# EAGLE board SparkFun_u-blox_SAM-M10Q-Panel (EAGLE 9.6.2), part 1 of 3
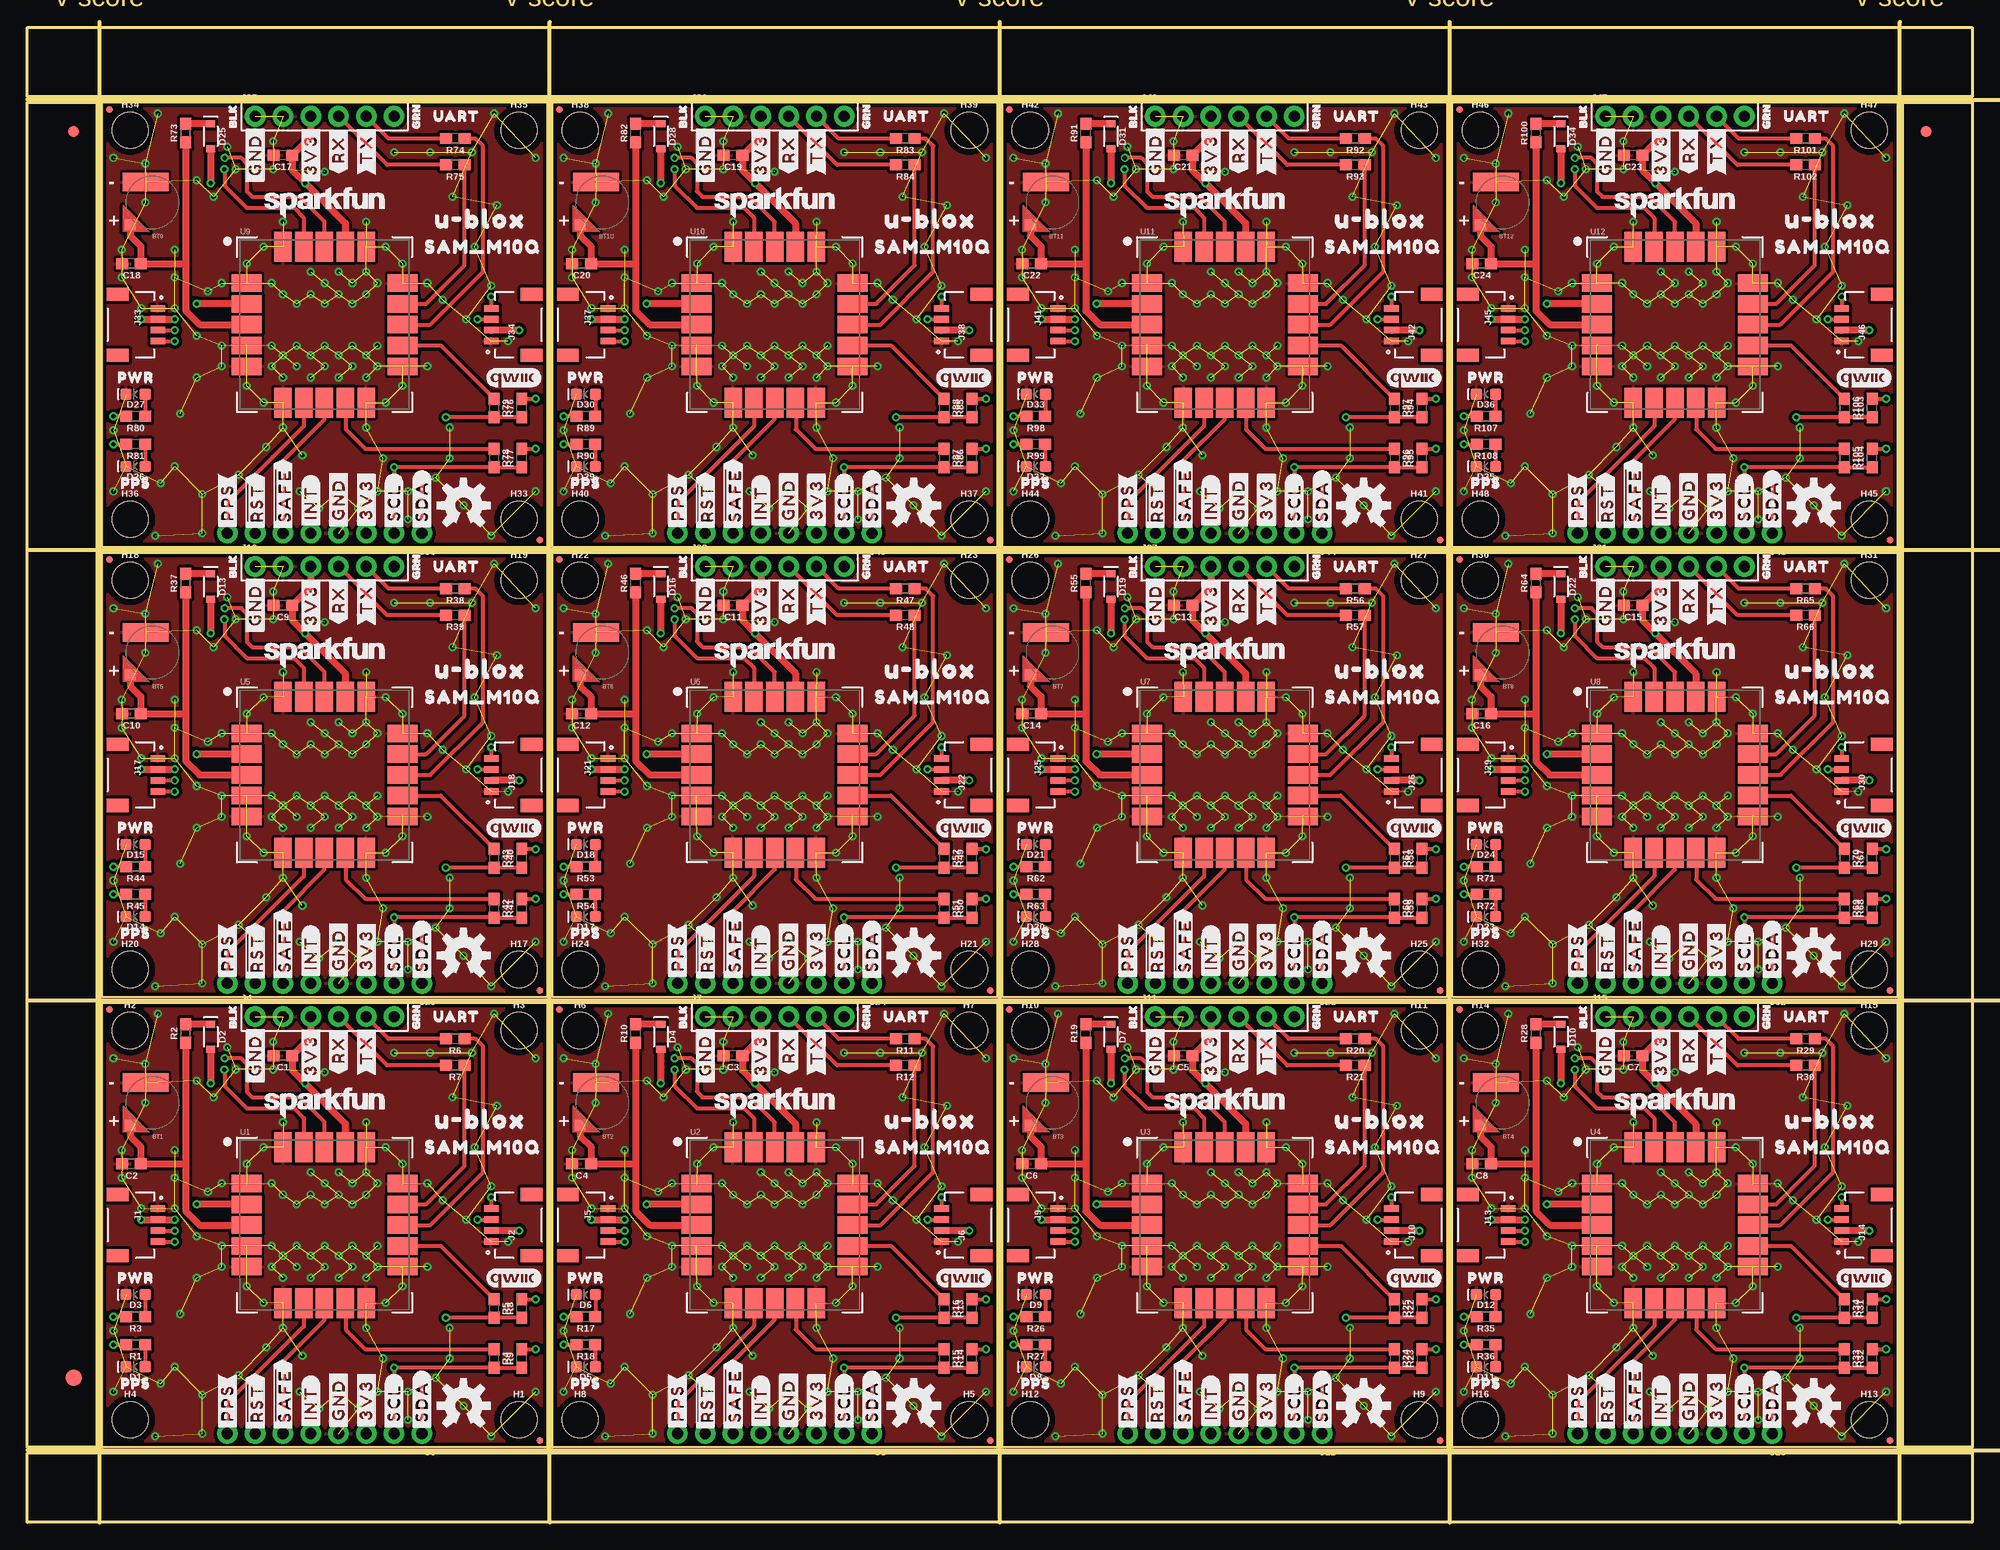
[diagram p0: board, top side]
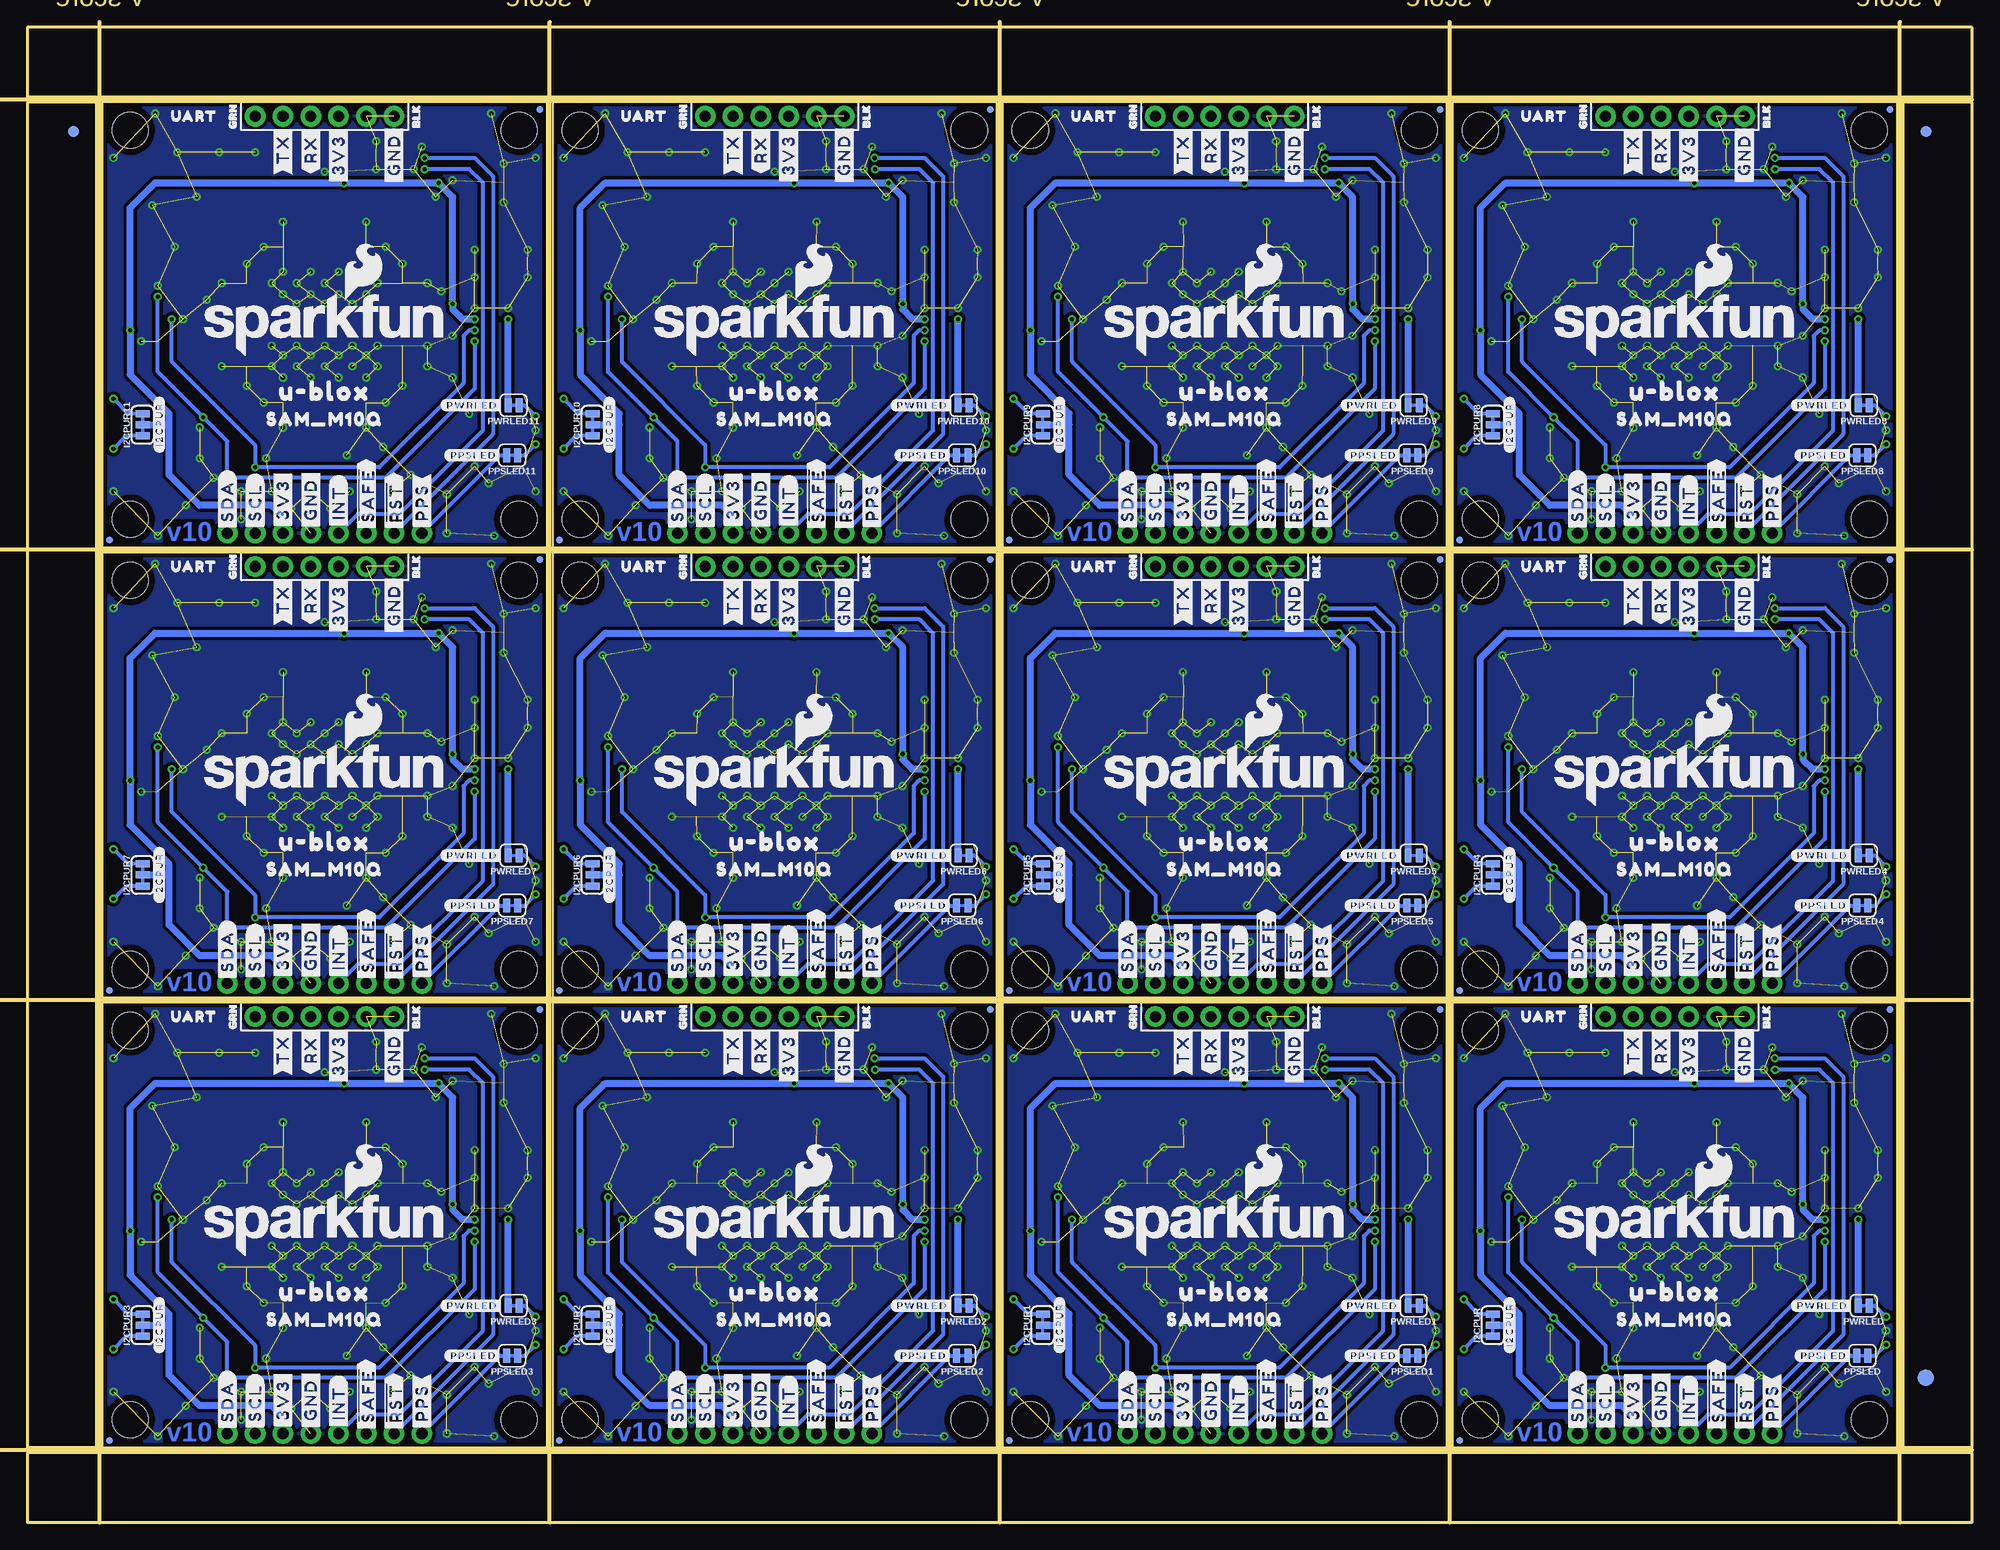
[diagram p1: board, bottom side, seen from below]

Size 177.8 x 136.65 mm. Coordinates in mm from the lower left corner, seen from the top.
Outline: 6.86,6.86 6.86,47.5 47.5,47.5 47.5,6.86 6.86,6.86
Outline: 48.01,6.86 48.01,47.5 88.65,47.5 88.65,6.86 48.01,6.86
Outline: 89.15,6.86 89.15,47.5 129.79,47.5 129.79,6.86 89.15,6.86
Outline: 130.3,6.86 130.3,47.5 170.94,47.5 170.94,6.86 130.3,6.86
Outline: 6.86,48.01 6.86,88.65 47.5,88.65 47.5,48.01 6.86,48.01
Outline: 48.01,48.01 48.01,88.65 88.65,88.65 88.65,48.01 48.01,48.01
Outline: 89.15,48.01 89.15,88.65 129.79,88.65 129.79,48.01 89.15,48.01
Outline: 130.3,48.01 130.3,88.65 170.94,88.65 170.94,48.01 130.3,48.01
Outline: 6.86,89.15 6.86,129.79 47.5,129.79 47.5,89.15 6.86,89.15
Outline: 48.01,89.15 48.01,129.79 88.65,129.79 88.65,89.15 48.01,89.15
Outline: 89.15,89.15 89.15,129.79 129.79,129.79 129.79,89.15 89.15,89.15
Outline: 130.3,89.15 130.3,129.79 170.94,129.79 170.94,89.15 130.3,89.15
Outline: 0,6.35 177.8,6.35 177.8,0 0,0 0,6.35
Outline: 171.45,129.79 177.8,129.79 177.8,6.86 171.45,6.86 171.45,129.79
Outline: 0,136.65 177.8,136.65 177.8,130.3 0,130.3 0,136.65
Outline: 0,129.79 6.35,129.79 6.35,6.86 0,6.86 0,129.79
Copper layers (1*16): Top 0.035mm / dielectric 1.5mm / Bottom 0.035mm
Design rules "SparkFun_u-blox_SAM-M10Q": minimum track width 7mil, minimum drill 0.3mm, track to track 7mil, track to pad 7mil, pad to pad 7mil, via to via 7mil, smd to smd 7mil, copper to edge 7mil, drill to drill 7mil, minimum pad ring 7mil, minimum via ring 7mil, stop-mask expansion 3mil, vias tented up to drill 25mil, thermal gap 10mil
tRestrict: area 19.8,24.3 to 20.3,24.4; area 61,24.3 to 61.5,24.4; area 102.1,24.3 to 102.6,24.4; area 143.3,24.3 to 143.8,24.4; area 19.8,65.4 to 20.3,65.5; area 61,65.4 to 61.5,65.5; area 102.1,65.4 to 102.6,65.5; area 143.3,65.4 to 143.8,65.5; area 19.8,106.6 to 20.3,106.7; area 61,106.6 to 61.5,106.7; area 102.1,106.6 to 102.6,106.7; area 143.3,106.6 to 143.8,106.7
Milling: 9 lines

## Footprints (pad centres in the part's own frame; a part is rotated, then mirrored left to right if it is on the bottom)
ML414H_IV01E = smd 1 x 1: + 2.022,2.032 | smd 4.2 x 1.7: - 0.6,-1.85
0603 = smd 1.1 x 1: 1 -0.85,0; 2 0.85,0
LED-0603 = smd 1 x 1: A -0.877,0; C 0.877,0
SOD-323 = smd 0.63 x 0.83: A 1.15,0; C -1.15,0
FIDUCIAL-1X2 = smd 1 x 1: 1 0,0
FIDUCIAL-1.5X3 = smd 1.5 x 1.5: 1 0,0
FIDUCIAL-MICRO = smd 0.635 x 0.635: 1 0,0
STAND-OFF = hole 3.302: 0,0
SMT-JUMPER_3_2-NC_TRACE_SILK = smd 0.635 x 1.27: 1 -1.016,0; 2 0,0; 3 1.016,0
JST04_1MM_RA = smd 0.6 x 1.35: 1 -1.5,0; 2 -0.5,0; 3 0.5,0; 4 1.5,0 | smd 1.2 x 2: NC1 2.8,-3.675; NC2 -2.8,-3.675
1X08_NO_SILK = drill 1.016 pad 1.88: 1 0,0; 2 2.54,0; 3 5.08,0; 4 7.62,0; 5 10.16,0; 6 12.7,0; 7 15.24,0; 8 17.78,0
1X06_NO_SILK = drill 1.016 pad 1.88: 1 0,0; 2 2.54,0; 3 5.08,0; 4 7.62,0; 5 10.16,0; 6 12.7,0
SMT-JUMPER_2_NC_TRACE_SILK = smd 0.635 x 1.27: 1 -0.508,0; 2 0.508,0
SAM-M10Q = smd 2.75 x 1.6: 1 -7.125,3.8; 2 -7.125,1.9; 3 -7.125,0; 4 -7.125,-1.9; 5 -7.125,-3.8; 11 7.125,-3.8; 12 7.125,-1.9; 13 7.125,0; 14 7.125,1.9; 15 7.125,3.8 | smd 1.6 x 2.75: 6 -3.8,-7.125; 7 -1.9,-7.125; 8 0,-7.125; 9 1.9,-7.125; 10 3.8,-7.125; 16 3.8,7.125; 17 1.9,7.125; 18 0,7.125; 19 -1.9,7.125; 20 -3.8,7.125

## Placement (x,y rotation side)
BT1  6.8MM_COIN_CELL  [ML414H_IV01E]  11.43,38.35 180 top
BT2  6.8MM_COIN_CELL  [ML414H_IV01E]  52.58,38.35 180 top
BT3  6.8MM_COIN_CELL  [ML414H_IV01E]  93.73,38.35 180 top
BT4  6.8MM_COIN_CELL  [ML414H_IV01E]  134.87,38.35 180 top
BT5  6.8MM_COIN_CELL  [ML414H_IV01E]  11.43,79.5 180 top
BT6  6.8MM_COIN_CELL  [ML414H_IV01E]  52.58,79.5 180 top
BT7  6.8MM_COIN_CELL  [ML414H_IV01E]  93.73,79.5 180 top
BT8  6.8MM_COIN_CELL  [ML414H_IV01E]  134.87,79.5 180 top
BT9  6.8MM_COIN_CELL  [ML414H_IV01E]  11.43,120.65 180 top
BT10  6.8MM_COIN_CELL  [ML414H_IV01E]  52.58,120.65 180 top
BT11  6.8MM_COIN_CELL  [ML414H_IV01E]  93.73,120.65 180 top
BT12  6.8MM_COIN_CELL  [ML414H_IV01E]  134.87,120.65 180 top
C1  0.1uF  [0603]  23.37,42.67 180 top
C2  0.1uF  [0603]  9.52,32.77 180 top
C3  0.1uF  [0603]  64.52,42.67 180 top
C4  0.1uF  [0603]  50.67,32.77 180 top
C5  0.1uF  [0603]  105.66,42.67 180 top
C6  0.1uF  [0603]  91.82,32.77 180 top
C7  0.1uF  [0603]  146.81,42.67 180 top
C8  0.1uF  [0603]  132.97,32.77 180 top
C9  0.1uF  [0603]  23.37,83.82 180 top
C10  0.1uF  [0603]  9.52,73.91 180 top
C11  0.1uF  [0603]  64.52,83.82 180 top
C12  0.1uF  [0603]  50.67,73.91 180 top
C13  0.1uF  [0603]  105.66,83.82 180 top
C14  0.1uF  [0603]  91.82,73.91 180 top
C15  0.1uF  [0603]  146.81,83.82 180 top
C16  0.1uF  [0603]  132.97,73.91 180 top
C17  0.1uF  [0603]  23.37,124.97 180 top
C18  0.1uF  [0603]  9.52,115.06 180 top
C19  0.1uF  [0603]  64.52,124.97 180 top
C20  0.1uF  [0603]  50.67,115.06 180 top
C21  0.1uF  [0603]  105.66,124.97 180 top
C22  0.1uF  [0603]  91.82,115.06 180 top
C23  0.1uF  [0603]  146.81,124.97 180 top
C24  0.1uF  [0603]  132.97,115.06 180 top
D1  Yellow  [LED-0603]  9.91,14.22 180 top
D2  0.5A/40V/420mV  [SOD-323]  16.76,44.4 270 top
D3  RED  [LED-0603]  9.91,20.83 180 top
D4  0.5A/40V/420mV  [SOD-323]  57.91,44.4 270 top
D5  Yellow  [LED-0603]  51.05,14.22 180 top
D6  RED  [LED-0603]  51.05,20.83 180 top
D7  0.5A/40V/420mV  [SOD-323]  99.06,44.4 270 top
D8  Yellow  [LED-0603]  92.2,14.22 180 top
D9  RED  [LED-0603]  92.2,20.83 180 top
D10  0.5A/40V/420mV  [SOD-323]  140.21,44.4 270 top
D11  Yellow  [LED-0603]  133.35,14.22 180 top
D12  RED  [LED-0603]  133.35,20.83 180 top
D13  0.5A/40V/420mV  [SOD-323]  16.76,85.55 270 top
D14  Yellow  [LED-0603]  9.91,55.37 180 top
D15  RED  [LED-0603]  9.91,61.98 180 top
D16  0.5A/40V/420mV  [SOD-323]  57.91,85.55 270 top
D17  Yellow  [LED-0603]  51.05,55.37 180 top
D18  RED  [LED-0603]  51.05,61.98 180 top
D19  0.5A/40V/420mV  [SOD-323]  99.06,85.55 270 top
D20  Yellow  [LED-0603]  92.2,55.37 180 top
D21  RED  [LED-0603]  92.2,61.98 180 top
D22  0.5A/40V/420mV  [SOD-323]  140.21,85.55 270 top
D23  Yellow  [LED-0603]  133.35,55.37 180 top
D24  RED  [LED-0603]  133.35,61.98 180 top
D25  0.5A/40V/420mV  [SOD-323]  16.76,126.7 270 top
D26  Yellow  [LED-0603]  9.91,96.52 180 top
D27  RED  [LED-0603]  9.91,103.12 180 top
D28  0.5A/40V/420mV  [SOD-323]  57.91,126.7 270 top
D29  Yellow  [LED-0603]  51.05,96.52 180 top
D30  RED  [LED-0603]  51.05,103.12 180 top
D31  0.5A/40V/420mV  [SOD-323]  99.06,126.7 270 top
D32  Yellow  [LED-0603]  92.2,96.52 180 top
D33  RED  [LED-0603]  92.2,103.12 180 top
D34  0.5A/40V/420mV  [SOD-323]  140.21,126.7 270 top
D35  Yellow  [LED-0603]  133.35,96.52 180 top
D36  RED  [LED-0603]  133.35,103.12 180 top
E$1  [FIDUCIAL-1X2]  4.23,127.13 0 top
E$2  [FIDUCIAL-1X2]  4.23,127.13 0 bottom
E$3  [FIDUCIAL-1X2]  173.57,127.13 0 top
E$4  [FIDUCIAL-1X2]  173.57,127.13 0 bottom
E$5  [FIDUCIAL-1.5X3]  4.23,13.21 0 top
E$6  [FIDUCIAL-1.5X3]  4.23,13.21 0 bottom
FD1  FIDUCIALUFIDUCIAL  [FIDUCIAL-MICRO]  46.86,7.49 0 bottom
FD2  FIDUCIALUFIDUCIAL  [FIDUCIAL-MICRO]  7.49,46.86 0 top
FD3  FIDUCIALUFIDUCIAL  [FIDUCIAL-MICRO]  7.49,46.86 0 bottom
FD4  FIDUCIALUFIDUCIAL  [FIDUCIAL-MICRO]  46.86,7.49 0 top
FD5  FIDUCIALUFIDUCIAL  [FIDUCIAL-MICRO]  88.01,7.49 0 bottom
FD6  FIDUCIALUFIDUCIAL  [FIDUCIAL-MICRO]  48.64,46.86 0 top
FD7  FIDUCIALUFIDUCIAL  [FIDUCIAL-MICRO]  48.64,46.86 0 bottom
FD8  FIDUCIALUFIDUCIAL  [FIDUCIAL-MICRO]  88.01,7.49 0 top
FD9  FIDUCIALUFIDUCIAL  [FIDUCIAL-MICRO]  129.16,7.49 0 bottom
FD10  FIDUCIALUFIDUCIAL  [FIDUCIAL-MICRO]  89.79,46.86 0 top
FD11  FIDUCIALUFIDUCIAL  [FIDUCIAL-MICRO]  89.79,46.86 0 bottom
FD12  FIDUCIALUFIDUCIAL  [FIDUCIAL-MICRO]  129.16,7.49 0 top
FD13  FIDUCIALUFIDUCIAL  [FIDUCIAL-MICRO]  170.31,7.49 0 bottom
FD14  FIDUCIALUFIDUCIAL  [FIDUCIAL-MICRO]  130.94,46.86 0 top
FD15  FIDUCIALUFIDUCIAL  [FIDUCIAL-MICRO]  130.94,46.86 0 bottom
FD16  FIDUCIALUFIDUCIAL  [FIDUCIAL-MICRO]  170.31,7.49 0 top
FD17  FIDUCIALUFIDUCIAL  [FIDUCIAL-MICRO]  46.86,48.64 0 bottom
FD18  FIDUCIALUFIDUCIAL  [FIDUCIAL-MICRO]  7.49,88.01 0 top
FD19  FIDUCIALUFIDUCIAL  [FIDUCIAL-MICRO]  7.49,88.01 0 bottom
FD20  FIDUCIALUFIDUCIAL  [FIDUCIAL-MICRO]  46.86,48.64 0 top
FD21  FIDUCIALUFIDUCIAL  [FIDUCIAL-MICRO]  88.01,48.64 0 bottom
FD22  FIDUCIALUFIDUCIAL  [FIDUCIAL-MICRO]  48.64,88.01 0 top
FD23  FIDUCIALUFIDUCIAL  [FIDUCIAL-MICRO]  48.64,88.01 0 bottom
FD24  FIDUCIALUFIDUCIAL  [FIDUCIAL-MICRO]  88.01,48.64 0 top
FD25  FIDUCIALUFIDUCIAL  [FIDUCIAL-MICRO]  129.16,48.64 0 bottom
FD26  FIDUCIALUFIDUCIAL  [FIDUCIAL-MICRO]  89.79,88.01 0 top
FD27  FIDUCIALUFIDUCIAL  [FIDUCIAL-MICRO]  89.79,88.01 0 bottom
FD28  FIDUCIALUFIDUCIAL  [FIDUCIAL-MICRO]  129.16,48.64 0 top
FD29  FIDUCIALUFIDUCIAL  [FIDUCIAL-MICRO]  170.31,48.64 0 bottom
FD30  FIDUCIALUFIDUCIAL  [FIDUCIAL-MICRO]  130.94,88.01 0 top
FD31  FIDUCIALUFIDUCIAL  [FIDUCIAL-MICRO]  130.94,88.01 0 bottom
FD32  FIDUCIALUFIDUCIAL  [FIDUCIAL-MICRO]  170.31,48.64 0 top
FD33  FIDUCIALUFIDUCIAL  [FIDUCIAL-MICRO]  46.86,89.79 0 bottom
FD34  FIDUCIALUFIDUCIAL  [FIDUCIAL-MICRO]  7.49,129.16 0 top
FD35  FIDUCIALUFIDUCIAL  [FIDUCIAL-MICRO]  7.49,129.16 0 bottom
FD36  FIDUCIALUFIDUCIAL  [FIDUCIAL-MICRO]  46.86,89.79 0 top
FD37  FIDUCIALUFIDUCIAL  [FIDUCIAL-MICRO]  88.01,89.79 0 bottom
FD38  FIDUCIALUFIDUCIAL  [FIDUCIAL-MICRO]  48.64,129.16 0 top
FD39  FIDUCIALUFIDUCIAL  [FIDUCIAL-MICRO]  48.64,129.16 0 bottom
FD40  FIDUCIALUFIDUCIAL  [FIDUCIAL-MICRO]  88.01,89.79 0 top
FD41  FIDUCIALUFIDUCIAL  [FIDUCIAL-MICRO]  129.16,89.79 0 bottom
FD42  FIDUCIALUFIDUCIAL  [FIDUCIAL-MICRO]  89.79,129.16 0 top
FD43  FIDUCIALUFIDUCIAL  [FIDUCIAL-MICRO]  89.79,129.16 0 bottom
FD44  FIDUCIALUFIDUCIAL  [FIDUCIAL-MICRO]  129.16,89.79 0 top
FD45  FIDUCIALUFIDUCIAL  [FIDUCIAL-MICRO]  170.31,89.79 0 bottom
FD46  FIDUCIALUFIDUCIAL  [FIDUCIAL-MICRO]  130.94,129.16 0 top
FD47  FIDUCIALUFIDUCIAL  [FIDUCIAL-MICRO]  130.94,129.16 0 bottom
FD48  FIDUCIALUFIDUCIAL  [FIDUCIAL-MICRO]  170.31,89.79 0 top
H1  STAND-OFF  [STAND-OFF]  44.96,9.4 0 top
H2  STAND-OFF  [STAND-OFF]  9.4,44.96 0 top
H3  STAND-OFF  [STAND-OFF]  44.96,44.96 0 top
H4  STAND-OFF  [STAND-OFF]  9.4,9.4 0 top
H5  STAND-OFF  [STAND-OFF]  86.11,9.4 0 top
H6  STAND-OFF  [STAND-OFF]  50.55,44.96 0 top
H7  STAND-OFF  [STAND-OFF]  86.11,44.96 0 top
H8  STAND-OFF  [STAND-OFF]  50.55,9.4 0 top
H9  STAND-OFF  [STAND-OFF]  127.25,9.4 0 top
H10  STAND-OFF  [STAND-OFF]  91.69,44.96 0 top
H11  STAND-OFF  [STAND-OFF]  127.25,44.96 0 top
H12  STAND-OFF  [STAND-OFF]  91.69,9.4 0 top
H13  STAND-OFF  [STAND-OFF]  168.4,9.4 0 top
H14  STAND-OFF  [STAND-OFF]  132.84,44.96 0 top
H15  STAND-OFF  [STAND-OFF]  168.4,44.96 0 top
H16  STAND-OFF  [STAND-OFF]  132.84,9.4 0 top
H17  STAND-OFF  [STAND-OFF]  44.96,50.55 0 top
H18  STAND-OFF  [STAND-OFF]  9.4,86.11 0 top
H19  STAND-OFF  [STAND-OFF]  44.96,86.11 0 top
H20  STAND-OFF  [STAND-OFF]  9.4,50.55 0 top
H21  STAND-OFF  [STAND-OFF]  86.11,50.55 0 top
H22  STAND-OFF  [STAND-OFF]  50.55,86.11 0 top
H23  STAND-OFF  [STAND-OFF]  86.11,86.11 0 top
H24  STAND-OFF  [STAND-OFF]  50.55,50.55 0 top
H25  STAND-OFF  [STAND-OFF]  127.25,50.55 0 top
H26  STAND-OFF  [STAND-OFF]  91.69,86.11 0 top
H27  STAND-OFF  [STAND-OFF]  127.25,86.11 0 top
H28  STAND-OFF  [STAND-OFF]  91.69,50.55 0 top
H29  STAND-OFF  [STAND-OFF]  168.4,50.55 0 top
H30  STAND-OFF  [STAND-OFF]  132.84,86.11 0 top
H31  STAND-OFF  [STAND-OFF]  168.4,86.11 0 top
H32  STAND-OFF  [STAND-OFF]  132.84,50.55 0 top
H33  STAND-OFF  [STAND-OFF]  44.96,91.69 0 top
H34  STAND-OFF  [STAND-OFF]  9.4,127.25 0 top
H35  STAND-OFF  [STAND-OFF]  44.96,127.25 0 top
H36  STAND-OFF  [STAND-OFF]  9.4,91.69 0 top
H37  STAND-OFF  [STAND-OFF]  86.11,91.69 0 top
H38  STAND-OFF  [STAND-OFF]  50.55,127.25 0 top
H39  STAND-OFF  [STAND-OFF]  86.11,127.25 0 top
H40  STAND-OFF  [STAND-OFF]  50.55,91.69 0 top
H41  STAND-OFF  [STAND-OFF]  127.25,91.69 0 top
H42  STAND-OFF  [STAND-OFF]  91.69,127.25 0 top
H43  STAND-OFF  [STAND-OFF]  127.25,127.25 0 top
H44  STAND-OFF  [STAND-OFF]  91.69,91.69 0 top
H45  STAND-OFF  [STAND-OFF]  168.4,91.69 0 top
H46  STAND-OFF  [STAND-OFF]  132.84,127.25 0 top
H47  STAND-OFF  [STAND-OFF]  168.4,127.25 0 top
H48  STAND-OFF  [STAND-OFF]  132.84,91.69 0 top
I2CPUR  JUMPER-SMT_3_2-NC_TRACE_SILK  [SMT-JUMPER_3_2-NC_TRACE_SILK]  43.81,18.03 90 bottom
I2CPUR1  JUMPER-SMT_3_2-NC_TRACE_SILK  [SMT-JUMPER_3_2-NC_TRACE_SILK]  84.96,18.03 90 bottom
I2CPUR2  JUMPER-SMT_3_2-NC_TRACE_SILK  [SMT-JUMPER_3_2-NC_TRACE_SILK]  126.11,18.03 90 bottom
I2CPUR3  JUMPER-SMT_3_2-NC_TRACE_SILK  [SMT-JUMPER_3_2-NC_TRACE_SILK]  167.26,18.03 90 bottom
I2CPUR4  JUMPER-SMT_3_2-NC_TRACE_SILK  [SMT-JUMPER_3_2-NC_TRACE_SILK]  43.81,59.18 90 bottom
I2CPUR5  JUMPER-SMT_3_2-NC_TRACE_SILK  [SMT-JUMPER_3_2-NC_TRACE_SILK]  84.96,59.18 90 bottom
I2CPUR6  JUMPER-SMT_3_2-NC_TRACE_SILK  [SMT-JUMPER_3_2-NC_TRACE_SILK]  126.11,59.18 90 bottom
I2CPUR7  JUMPER-SMT_3_2-NC_TRACE_SILK  [SMT-JUMPER_3_2-NC_TRACE_SILK]  167.26,59.18 90 bottom
I2CPUR8  JUMPER-SMT_3_2-NC_TRACE_SILK  [SMT-JUMPER_3_2-NC_TRACE_SILK]  43.81,100.33 90 bottom
I2CPUR9  JUMPER-SMT_3_2-NC_TRACE_SILK  [SMT-JUMPER_3_2-NC_TRACE_SILK]  84.96,100.33 90 bottom
I2CPUR10  JUMPER-SMT_3_2-NC_TRACE_SILK  [SMT-JUMPER_3_2-NC_TRACE_SILK]  126.11,100.33 90 bottom
I2CPUR11  JUMPER-SMT_3_2-NC_TRACE_SILK  [SMT-JUMPER_3_2-NC_TRACE_SILK]  167.26,100.33 90 bottom
J1  Qwiic Right Angle  [JST04_1MM_RA]  11.94,27.18 270 top
J2  Qwiic Right Angle  [JST04_1MM_RA]  42.42,27.18 90 top
J3  [1X08_NO_SILK]  36.07,8.13 180 top
J4  BOOT  [1X06_NO_SILK]  20.83,46.23 0 top
J5  Qwiic Right Angle  [JST04_1MM_RA]  53.09,27.18 270 top
J6  Qwiic Right Angle  [JST04_1MM_RA]  83.57,27.18 90 top
J7  BOOT  [1X06_NO_SILK]  61.98,46.23 0 top
J8  [1X08_NO_SILK]  77.22,8.13 180 top
J9  Qwiic Right Angle  [JST04_1MM_RA]  94.23,27.18 270 top
J10  Qwiic Right Angle  [JST04_1MM_RA]  124.71,27.18 90 top
J11  BOOT  [1X06_NO_SILK]  103.12,46.23 0 top
J12  [1X08_NO_SILK]  118.36,8.13 180 top
J13  Qwiic Right Angle  [JST04_1MM_RA]  135.38,27.18 270 top
J14  Qwiic Right Angle  [JST04_1MM_RA]  165.86,27.18 90 top
J15  BOOT  [1X06_NO_SILK]  144.27,46.23 0 top
J16  [1X08_NO_SILK]  159.51,8.13 180 top
J17  Qwiic Right Angle  [JST04_1MM_RA]  11.94,68.33 270 top
J18  Qwiic Right Angle  [JST04_1MM_RA]  42.42,68.33 90 top
J19  BOOT  [1X06_NO_SILK]  20.83,87.38 0 top
J20  [1X08_NO_SILK]  36.07,49.28 180 top
J21  Qwiic Right Angle  [JST04_1MM_RA]  53.09,68.33 270 top
J22  Qwiic Right Angle  [JST04_1MM_RA]  83.57,68.33 90 top
J23  BOOT  [1X06_NO_SILK]  61.98,87.38 0 top
J24  [1X08_NO_SILK]  77.22,49.28 180 top
J25  Qwiic Right Angle  [JST04_1MM_RA]  94.23,68.33 270 top
J26  Qwiic Right Angle  [JST04_1MM_RA]  124.71,68.33 90 top
J27  BOOT  [1X06_NO_SILK]  103.12,87.38 0 top
J28  [1X08_NO_SILK]  118.36,49.28 180 top
J29  Qwiic Right Angle  [JST04_1MM_RA]  135.38,68.33 270 top
J30  Qwiic Right Angle  [JST04_1MM_RA]  165.86,68.33 90 top
J31  BOOT  [1X06_NO_SILK]  144.27,87.38 0 top
J32  [1X08_NO_SILK]  159.51,49.28 180 top
J33  Qwiic Right Angle  [JST04_1MM_RA]  11.94,109.47 270 top
J34  Qwiic Right Angle  [JST04_1MM_RA]  42.42,109.47 90 top
J35  BOOT  [1X06_NO_SILK]  20.83,128.52 0 top
J36  [1X08_NO_SILK]  36.07,90.42 180 top
J37  Qwiic Right Angle  [JST04_1MM_RA]  53.09,109.47 270 top
J38  Qwiic Right Angle  [JST04_1MM_RA]  83.57,109.47 90 top
J39  BOOT  [1X06_NO_SILK]  61.98,128.52 0 top
J40  [1X08_NO_SILK]  77.22,90.42 180 top
J41  Qwiic Right Angle  [JST04_1MM_RA]  94.23,109.47 270 top
J42  Qwiic Right Angle  [JST04_1MM_RA]  124.71,109.47 90 top
J43  BOOT  [1X06_NO_SILK]  103.12,128.52 0 top
J44  [1X08_NO_SILK]  118.36,90.42 180 top
J45  Qwiic Right Angle  [JST04_1MM_RA]  135.38,109.47 270 top
J46  Qwiic Right Angle  [JST04_1MM_RA]  165.86,109.47 90 top
J47  BOOT  [1X06_NO_SILK]  144.27,128.52 0 top
J48  [1X08_NO_SILK]  159.51,90.42 180 top
LOGO1  OSHW-LOGOM  [OSHW-LOGO-M]  39.88,10.67 0 top
LOGO2  SFE_LOGO_NAME_FLAME.2_INCH  [SFE_LOGO_NAME_FLAME_.2]  27.18,27.18 0 bottom
LOGO3  OSHW-LOGOM  [OSHW-LOGO-M]  81.03,10.67 0 top
LOGO4  SFE_LOGO_NAME_FLAME.2_INCH  [SFE_LOGO_NAME_FLAME_.2]  68.33,27.18 0 bottom
LOGO5  OSHW-LOGOM  [OSHW-LOGO-M]  122.17,10.67 0 top
LOGO6  SFE_LOGO_NAME_FLAME.2_INCH  [SFE_LOGO_NAME_FLAME_.2]  109.47,27.18 0 bottom
LOGO7  OSHW-LOGOM  [OSHW-LOGO-M]  163.32,10.67 0 top
LOGO8  SFE_LOGO_NAME_FLAME.2_INCH  [SFE_LOGO_NAME_FLAME_.2]  150.62,27.18 0 bottom
LOGO9  OSHW-LOGOM  [OSHW-LOGO-M]  39.88,51.82 0 top
LOGO10  SFE_LOGO_NAME_FLAME.2_INCH  [SFE_LOGO_NAME_FLAME_.2]  27.18,68.33 0 bottom
LOGO11  OSHW-LOGOM  [OSHW-LOGO-M]  81.03,51.82 0 top
LOGO12  SFE_LOGO_NAME_FLAME.2_INCH  [SFE_LOGO_NAME_FLAME_.2]  68.33,68.33 0 bottom
LOGO13  OSHW-LOGOM  [OSHW-LOGO-M]  122.17,51.82 0 top
LOGO14  SFE_LOGO_NAME_FLAME.2_INCH  [SFE_LOGO_NAME_FLAME_.2]  109.47,68.33 0 bottom
LOGO15  OSHW-LOGOM  [OSHW-LOGO-M]  163.32,51.82 0 top
LOGO16  SFE_LOGO_NAME_FLAME.2_INCH  [SFE_LOGO_NAME_FLAME_.2]  150.62,68.33 0 bottom
LOGO17  OSHW-LOGOM  [OSHW-LOGO-M]  39.88,92.96 0 top
LOGO18  SFE_LOGO_NAME_FLAME.2_INCH  [SFE_LOGO_NAME_FLAME_.2]  27.18,109.47 0 bottom
LOGO19  OSHW-LOGOM  [OSHW-LOGO-M]  81.03,92.96 0 top
LOGO20  SFE_LOGO_NAME_FLAME.2_INCH  [SFE_LOGO_NAME_FLAME_.2]  68.33,109.47 0 bottom
LOGO21  OSHW-LOGOM  [OSHW-LOGO-M]  122.17,92.96 0 top
LOGO22  SFE_LOGO_NAME_FLAME.2_INCH  [SFE_LOGO_NAME_FLAME_.2]  109.47,109.47 0 bottom
LOGO23  OSHW-LOGOM  [OSHW-LOGO-M]  163.32,92.96 0 top
LOGO24  SFE_LOGO_NAME_FLAME.2_INCH  [SFE_LOGO_NAME_FLAME_.2]  150.62,109.47 0 bottom
PPSLED  [SMT-JUMPER_2_NC_TRACE_SILK]  10.03,15.24 180 bottom
PPSLED1  [SMT-JUMPER_2_NC_TRACE_SILK]  51.18,15.24 180 bottom
PPSLED2  [SMT-JUMPER_2_NC_TRACE_SILK]  92.33,15.24 180 bottom
PPSLED3  [SMT-JUMPER_2_NC_TRACE_SILK]  133.48,15.24 180 bottom
PPSLED4  [SMT-JUMPER_2_NC_TRACE_SILK]  10.03,56.39 180 bottom
PPSLED5  [SMT-JUMPER_2_NC_TRACE_SILK]  51.18,56.39 180 bottom
PPSLED6  [SMT-JUMPER_2_NC_TRACE_SILK]  92.33,56.39 180 bottom
PPSLED7  [SMT-JUMPER_2_NC_TRACE_SILK]  133.48,56.39 180 bottom
PPSLED8  [SMT-JUMPER_2_NC_TRACE_SILK]  10.03,97.54 180 bottom
PPSLED9  [SMT-JUMPER_2_NC_TRACE_SILK]  51.18,97.54 180 bottom
PPSLED10  [SMT-JUMPER_2_NC_TRACE_SILK]  92.33,97.54 180 bottom
PPSLED11  [SMT-JUMPER_2_NC_TRACE_SILK]  133.48,97.54 180 bottom
PWRLED  JUMPER-SMT_2_NC_TRACE_SILK  [SMT-JUMPER_2_NC_TRACE_SILK]  9.91,19.81 180 bottom
PWRLED1  JUMPER-SMT_2_NC_TRACE_SILK  [SMT-JUMPER_2_NC_TRACE_SILK]  51.05,19.81 180 bottom
PWRLED2  JUMPER-SMT_2_NC_TRACE_SILK  [SMT-JUMPER_2_NC_TRACE_SILK]  92.2,19.81 180 bottom
PWRLED3  JUMPER-SMT_2_NC_TRACE_SILK  [SMT-JUMPER_2_NC_TRACE_SILK]  133.35,19.81 180 bottom
PWRLED4  JUMPER-SMT_2_NC_TRACE_SILK  [SMT-JUMPER_2_NC_TRACE_SILK]  9.91,60.96 180 bottom
PWRLED5  JUMPER-SMT_2_NC_TRACE_SILK  [SMT-JUMPER_2_NC_TRACE_SILK]  51.05,60.96 180 bottom
PWRLED6  JUMPER-SMT_2_NC_TRACE_SILK  [SMT-JUMPER_2_NC_TRACE_SILK]  92.2,60.96 180 bottom
PWRLED7  JUMPER-SMT_2_NC_TRACE_SILK  [SMT-JUMPER_2_NC_TRACE_SILK]  133.35,60.96 180 bottom
PWRLED8  JUMPER-SMT_2_NC_TRACE_SILK  [SMT-JUMPER_2_NC_TRACE_SILK]  9.91,102.11 180 bottom
PWRLED9  JUMPER-SMT_2_NC_TRACE_SILK  [SMT-JUMPER_2_NC_TRACE_SILK]  51.05,102.11 180 bottom
PWRLED10  JUMPER-SMT_2_NC_TRACE_SILK  [SMT-JUMPER_2_NC_TRACE_SILK]  92.2,102.11 180 bottom
PWRLED11  JUMPER-SMT_2_NC_TRACE_SILK  [SMT-JUMPER_2_NC_TRACE_SILK]  133.35,102.11 180 bottom
R1  2.2k  [0603]  9.91,16.26 180 top
R2  3.3k  [0603]  14.48,44.7 90 top
R3  1k  [0603]  9.91,18.8 180 top
R4  22  [0603]  42.67,14.99 270 top
R5  22  [0603]  42.67,19.56 270 top
R6  470  [0603]  39.12,44.2 180 top
R7  470  [0603]  39.12,41.78 180 top
R8  2.2k  [0603]  45.21,19.56 90 top
R9  2.2k  [0603]  45.21,14.99 90 top
R10  3.3k  [0603]  55.63,44.7 90 top
R11  470  [0603]  80.26,44.2 180 top
R12  470  [0603]  80.26,41.78 180 top
R13  2.2k  [0603]  86.36,19.56 90 top
R14  2.2k  [0603]  86.36,14.99 90 top
R15  22  [0603]  83.82,14.99 270 top
R16  22  [0603]  83.82,19.56 270 top
R17  1k  [0603]  51.05,18.8 180 top
R18  2.2k  [0603]  51.05,16.26 180 top
R19  3.3k  [0603]  96.77,44.7 90 top
R20  470  [0603]  121.41,44.2 180 top
R21  470  [0603]  121.41,41.78 180 top
R22  2.2k  [0603]  127.51,19.56 90 top
R23  2.2k  [0603]  127.51,14.99 90 top
R24  22  [0603]  124.97,14.99 270 top
R25  22  [0603]  124.97,19.56 270 top
R26  1k  [0603]  92.2,18.8 180 top
R27  2.2k  [0603]  92.2,16.26 180 top
R28  3.3k  [0603]  137.92,44.7 90 top
R29  470  [0603]  162.56,44.2 180 top
R30  470  [0603]  162.56,41.78 180 top
R31  2.2k  [0603]  168.66,19.56 90 top
R32  2.2k  [0603]  168.66,14.99 90 top
R33  22  [0603]  166.12,14.99 270 top
R34  22  [0603]  166.12,19.56 270 top
R35  1k  [0603]  133.35,18.8 180 top
R36  2.2k  [0603]  133.35,16.26 180 top
R37  3.3k  [0603]  14.48,85.85 90 top
R38  470  [0603]  39.12,85.34 180 top
R39  470  [0603]  39.12,82.93 180 top
R40  2.2k  [0603]  45.21,60.71 90 top
R41  2.2k  [0603]  45.21,56.13 90 top
R42  22  [0603]  42.67,56.13 270 top
R43  22  [0603]  42.67,60.71 270 top
R44  1k  [0603]  9.91,59.94 180 top
R45  2.2k  [0603]  9.91,57.4 180 top
R46  3.3k  [0603]  55.63,85.85 90 top
R47  470  [0603]  80.26,85.34 180 top
R48  470  [0603]  80.26,82.93 180 top
R49  2.2k  [0603]  86.36,60.71 90 top
R50  2.2k  [0603]  86.36,56.13 90 top
R51  22  [0603]  83.82,56.13 270 top
R52  22  [0603]  83.82,60.71 270 top
R53  1k  [0603]  51.05,59.94 180 top
R54  2.2k  [0603]  51.05,57.4 180 top
R55  3.3k  [0603]  96.77,85.85 90 top
R56  470  [0603]  121.41,85.34 180 top
R57  470  [0603]  121.41,82.93 180 top
R58  2.2k  [0603]  127.51,60.71 90 top
R59  2.2k  [0603]  127.51,56.13 90 top
R60  22  [0603]  124.97,56.13 270 top
R61  22  [0603]  124.97,60.71 270 top
R62  1k  [0603]  92.2,59.94 180 top
R63  2.2k  [0603]  92.2,57.4 180 top
R64  3.3k  [0603]  137.92,85.85 90 top
R65  470  [0603]  162.56,85.34 180 top
R66  470  [0603]  162.56,82.93 180 top
R67  2.2k  [0603]  168.66,60.71 90 top
R68  2.2k  [0603]  168.66,56.13 90 top
R69  22  [0603]  166.12,56.13 270 top
R70  22  [0603]  166.12,60.71 270 top
R71  1k  [0603]  133.35,59.94 180 top
R72  2.2k  [0603]  133.35,57.4 180 top
R73  3.3k  [0603]  14.48,127 90 top
R74  470  [0603]  39.12,126.49 180 top
R75  470  [0603]  39.12,124.08 180 top
R76  2.2k  [0603]  45.21,101.85 90 top
R77  2.2k  [0603]  45.21,97.28 90 top
R78  22  [0603]  42.67,97.28 270 top
R79  22  [0603]  42.67,101.85 270 top
R80  1k  [0603]  9.91,101.09 180 top
R81  2.2k  [0603]  9.91,98.55 180 top
R82  3.3k  [0603]  55.63,127 90 top
R83  470  [0603]  80.26,126.49 180 top
R84  470  [0603]  80.26,124.08 180 top
R85  2.2k  [0603]  86.36,101.85 90 top
R86  2.2k  [0603]  86.36,97.28 90 top
R87  22  [0603]  83.82,97.28 270 top
R88  22  [0603]  83.82,101.85 270 top
R89  1k  [0603]  51.05,101.09 180 top
R90  2.2k  [0603]  51.05,98.55 180 top
R91  3.3k  [0603]  96.77,127 90 top
R92  470  [0603]  121.41,126.49 180 top
R93  470  [0603]  121.41,124.08 180 top
R94  2.2k  [0603]  127.51,101.85 90 top
R95  2.2k  [0603]  127.51,97.28 90 top
R96  22  [0603]  124.97,97.28 270 top
R97  22  [0603]  124.97,101.85 270 top
R98  1k  [0603]  92.2,101.09 180 top
R99  2.2k  [0603]  92.2,98.55 180 top
R100  3.3k  [0603]  137.92,127 90 top
R101  470  [0603]  162.56,126.49 180 top
R102  470  [0603]  162.56,124.08 180 top
R103  2.2k  [0603]  168.66,101.85 90 top
R104  2.2k  [0603]  168.66,97.28 90 top
R105  22  [0603]  166.12,97.28 270 top
R106  22  [0603]  166.12,101.85 270 top
R107  1k  [0603]  133.35,101.09 180 top
R108  2.2k  [0603]  133.35,98.55 180 top
U1  U-BLOX_SAM_M10Q-00B  [SAM-M10Q]  27.18,27.18 0 top
U2  U-BLOX_SAM_M10Q-00B  [SAM-M10Q]  68.33,27.18 0 top
U3  U-BLOX_SAM_M10Q-00B  [SAM-M10Q]  109.47,27.18 0 top
U4  U-BLOX_SAM_M10Q-00B  [SAM-M10Q]  150.62,27.18 0 top
U5  U-BLOX_SAM_M10Q-00B  [SAM-M10Q]  27.18,68.33 0 top
U6  U-BLOX_SAM_M10Q-00B  [SAM-M10Q]  68.33,68.33 0 top
U7  U-BLOX_SAM_M10Q-00B  [SAM-M10Q]  109.47,68.33 0 top
U8  U-BLOX_SAM_M10Q-00B  [SAM-M10Q]  150.62,68.33 0 top
U9  U-BLOX_SAM_M10Q-00B  [SAM-M10Q]  27.18,109.47 0 top
U10  U-BLOX_SAM_M10Q-00B  [SAM-M10Q]  68.33,109.47 0 top
U11  U-BLOX_SAM_M10Q-00B  [SAM-M10Q]  109.47,109.47 0 top
U12  U-BLOX_SAM_M10Q-00B  [SAM-M10Q]  150.62,109.47 0 top
U$1  [SFE_LOGO_FLAME_STOP_.1]  13.97,9.4 0 top
U$2  [QWIIC_5MM]  44.45,22.35 0 top
U$3  [BLK4]  18.8,46.23 90 top
U$4  [BLK4]  18.8,46.23 90 bottom
U$5  [GRN5]  35.56,46.23 90 top
U$6  [GRN5]  35.56,46.23 90 bottom
U$7  [UART7]  39.24,46.23 0 top
U$8  [UART7]  39.12,46.23 0 bottom
U$9  [PPS9]  9.91,12.7 0 top
U$10  [PWR10]  9.91,22.35 0 top
U$11  [#TX#12]  30.99,43.18 90 top
U$12  [#TX#12]  30.99,43.18 90 bottom
U$13  [#RX#13]  28.45,43.18 90 top
U$14  [#RX#13]  28.45,43.18 90 bottom
U$15  [#3V3#0]  25.91,42.67 90 top
U$16  [#3V3#0]  25.91,42.67 90 bottom
U$17  [#GND#4]  20.83,42.67 90 top
U$18  [U#BLOX19]  41.4,36.83 0 top
U$19  [#GND#5]  28.45,11.18 90 top
U$20  [#GND#4]  20.83,42.67 90 bottom
U$21  [#GND#5]  28.45,11.18 90 bottom
U$22  [#3V3#0]  30.99,11.18 90 top
U$23  [#3V3#0]  30.99,11.18 90 bottom
U$24  [#SCL#6]  33.53,10.92 90 top
U$25  [#SCL#6]  33.53,10.92 90 bottom
U$26  [#SDA#7]  36.07,11.05 90 top
U$27  [#SDA#7]  36.07,11.05 90 bottom
U$28  [#INT#8]  25.91,10.92 90 top
U$29  [#INT#8]  25.91,10.92 90 bottom
U$30  [##RST##15]  20.83,10.92 90 top
U$31  [SFE_LOGO_NAME_.1]  27.18,38.35 0 top
U$32  [SAM_M10Q0]  41.66,34.29 0 top
U$33  [##RST##15]  20.83,10.92 90 bottom
U$34  [#PPS#13]  18.29,10.92 90 top
U$35  [#PPS#13]  18.29,10.92 90 bottom
U$36  [##SAFE##16]  23.37,11.56 90 top
U$37  [##SAFE##16]  23.37,11.56 90 bottom
U$38  [U#BLOX19]  27.18,21.08 0 bottom
U$39  [SAM_M10Q0]  27.18,18.54 0 bottom
U$40  [#PPSLED#0]  13.59,15.24 0 bottom
U$41  [#I2CPUR#0]  42.29,18.03 90 bottom
U$42  [#PWRLED#0]  13.72,19.81 0 bottom
U$43  [SFE_LOGO_FLAME_STOP_.1]  55.12,9.4 0 top
U$44  [QWIIC_5MM]  85.6,22.35 0 top
U$45  [BLK4]  59.94,46.23 90 top
U$46  [BLK4]  59.94,46.23 90 bottom
U$47  [GRN5]  76.71,46.23 90 top
U$48  [GRN5]  76.71,46.23 90 bottom
U$49  [UART7]  80.39,46.23 0 top
U$50  [UART7]  80.26,46.23 0 bottom
U$51  [PPS9]  51.05,12.7 0 top
U$52  [PWR10]  51.05,22.35 0 top
U$53  [#TX#12]  72.14,43.18 90 top
U$54  [#TX#12]  72.14,43.18 90 bottom
U$55  [#RX#13]  69.6,43.18 90 top
U$56  [#RX#13]  69.6,43.18 90 bottom
U$57  [#3V3#0]  67.06,42.67 90 top
U$58  [#3V3#0]  67.06,42.67 90 bottom
U$59  [#GND#4]  61.98,42.67 90 top
U$60  [#GND#4]  61.98,42.67 90 bottom
U$61  [#GND#5]  69.6,11.18 90 top
U$62  [#GND#5]  69.6,11.18 90 bottom
U$63  [#3V3#0]  72.14,11.18 90 top
U$64  [#3V3#0]  72.14,11.18 90 bottom
U$65  [#SCL#6]  74.68,10.92 90 top
U$66  [#SCL#6]  74.68,10.92 90 bottom
U$67  [#SDA#7]  77.22,11.05 90 top
U$68  [#SDA#7]  77.22,11.05 90 bottom
U$69  [#INT#8]  67.06,10.92 90 top
U$70  [#INT#8]  67.06,10.92 90 bottom
U$71  [#PPS#13]  59.44,10.92 90 top
U$72  [#PPS#13]  59.44,10.92 90 bottom
U$73  [##RST##15]  61.98,10.92 90 top
U$74  [##RST##15]  61.98,10.92 90 bottom
U$75  [##SAFE##16]  64.52,11.56 90 top
U$76  [##SAFE##16]  64.52,11.56 90 bottom
U$77  [SFE_LOGO_NAME_.1]  68.33,38.35 0 top
U$78  [U#BLOX19]  82.55,36.83 0 top
U$79  [SAM_M10Q0]  82.8,34.29 0 top
U$80  [U#BLOX19]  68.33,21.08 0 bottom
U$81  [SAM_M10Q0]  68.33,18.54 0 bottom
U$82  [#PWRLED#0]  54.86,19.81 0 bottom
U$83  [#PPSLED#0]  54.74,15.24 0 bottom
U$84  [#I2CPUR#0]  83.44,18.03 90 bottom
U$85  [SFE_LOGO_FLAME_STOP_.1]  96.27,9.4 0 top
U$86  [QWIIC_5MM]  126.75,22.35 0 top
U$87  [BLK4]  101.09,46.23 90 top
U$88  [BLK4]  101.09,46.23 90 bottom
U$89  [GRN5]  117.86,46.23 90 top
U$90  [GRN5]  117.86,46.23 90 bottom
U$91  [UART7]  121.54,46.23 0 top
U$92  [UART7]  121.41,46.23 0 bottom
U$93  [PPS9]  92.2,12.7 0 top
U$94  [PWR10]  92.2,22.35 0 top
U$95  [#TX#12]  113.28,43.18 90 top
U$96  [#TX#12]  113.28,43.18 90 bottom
U$97  [#RX#13]  110.74,43.18 90 top
U$98  [#RX#13]  110.74,43.18 90 bottom
U$99  [#3V3#0]  108.2,42.67 90 top
U$100  [#3V3#0]  108.2,42.67 90 bottom
U$101  [#GND#4]  103.12,42.67 90 top
U$102  [#GND#4]  103.12,42.67 90 bottom
U$103  [#GND#5]  110.74,11.18 90 top
U$104  [#GND#5]  110.74,11.18 90 bottom
U$105  [#3V3#0]  113.28,11.18 90 top
U$106  [#3V3#0]  113.28,11.18 90 bottom
U$107  [#SCL#6]  115.82,10.92 90 top
U$108  [#SCL#6]  115.82,10.92 90 bottom
U$109  [#SDA#7]  118.36,11.05 90 top
U$110  [#SDA#7]  118.36,11.05 90 bottom
U$111  [#INT#8]  108.2,10.92 90 top
U$112  [#INT#8]  108.2,10.92 90 bottom
U$113  [#PPS#13]  100.58,10.92 90 top
U$114  [#PPS#13]  100.58,10.92 90 bottom
U$115  [##RST##15]  103.12,10.92 90 top
U$116  [##RST##15]  103.12,10.92 90 bottom
U$117  [##SAFE##16]  105.66,11.56 90 top
U$118  [##SAFE##16]  105.66,11.56 90 bottom
U$119  [SFE_LOGO_NAME_.1]  109.47,38.35 0 top
U$120  [U#BLOX19]  123.7,36.83 0 top
U$121  [SAM_M10Q0]  123.95,34.29 0 top
U$122  [U#BLOX19]  109.47,21.08 0 bottom
U$123  [SAM_M10Q0]  109.47,18.54 0 bottom
U$124  [#PWRLED#0]  96.01,19.81 0 bottom
U$125  [#PPSLED#0]  95.89,15.24 0 bottom
U$126  [#I2CPUR#0]  124.59,18.03 90 bottom
U$127  [SFE_LOGO_FLAME_STOP_.1]  137.41,9.4 0 top
U$128  [QWIIC_5MM]  167.89,22.35 0 top
U$129  [BLK4]  142.24,46.23 90 top
U$130  [BLK4]  142.24,46.23 90 bottom
U$131  [GRN5]  159,46.23 90 top
U$132  [GRN5]  159,46.23 90 bottom
U$133  [UART7]  162.69,46.23 0 top
U$134  [UART7]  162.56,46.23 0 bottom
U$135  [PPS9]  133.35,12.7 0 top
U$136  [PWR10]  133.35,22.35 0 top
U$137  [#TX#12]  154.43,43.18 90 top
U$138  [#TX#12]  154.43,43.18 90 bottom
U$139  [#RX#13]  151.89,43.18 90 top
U$140  [#RX#13]  151.89,43.18 90 bottom
U$141  [#3V3#0]  149.35,42.67 90 top
U$142  [#3V3#0]  149.35,42.67 90 bottom
U$143  [#GND#4]  144.27,42.67 90 top
U$144  [#GND#4]  144.27,42.67 90 bottom
U$145  [#GND#5]  151.89,11.18 90 top
U$146  [#GND#5]  151.89,11.18 90 bottom
U$147  [#3V3#0]  154.43,11.18 90 top
U$148  [#3V3#0]  154.43,11.18 90 bottom
U$149  [#SCL#6]  156.97,10.92 90 top
U$150  [#SCL#6]  156.97,10.92 90 bottom
U$151  [#SDA#7]  159.51,11.05 90 top
U$152  [#SDA#7]  159.51,11.05 90 bottom
U$153  [#INT#8]  149.35,10.92 90 top
U$154  [#INT#8]  149.35,10.92 90 bottom
U$155  [#PPS#13]  141.73,10.92 90 top
U$156  [#PPS#13]  141.73,10.92 90 bottom
U$157  [##RST##15]  144.27,10.92 90 top
U$158  [##RST##15]  144.27,10.92 90 bottom
U$159  [##SAFE##16]  146.81,11.56 90 top
U$160  [##SAFE##16]  146.81,11.56 90 bottom
U$161  [SFE_LOGO_NAME_.1]  150.62,38.35 0 top
U$162  [U#BLOX19]  164.85,36.83 0 top
U$163  [SAM_M10Q0]  165.1,34.29 0 top
U$164  [U#BLOX19]  150.62,21.08 0 bottom
U$165  [SAM_M10Q0]  150.62,18.54 0 bottom
U$166  [#PWRLED#0]  137.16,19.81 0 bottom
U$167  [#PPSLED#0]  137.03,15.24 0 bottom
U$168  [#I2CPUR#0]  165.74,18.03 90 bottom
U$169  [SFE_LOGO_FLAME_STOP_.1]  13.97,50.55 0 top
U$170  [QWIIC_5MM]  44.45,63.5 0 top
U$171  [BLK4]  18.8,87.38 90 top
U$172  [BLK4]  18.8,87.38 90 bottom
U$173  [GRN5]  35.56,87.38 90 top
U$174  [GRN5]  35.56,87.38 90 bottom
U$175  [UART7]  39.24,87.38 0 top
U$176  [UART7]  39.12,87.38 0 bottom
U$177  [PPS9]  9.91,53.85 0 top
U$178  [PWR10]  9.91,63.5 0 top
U$179  [#TX#12]  30.99,84.33 90 top
U$180  [#TX#12]  30.99,84.33 90 bottom
U$181  [#RX#13]  28.45,84.33 90 top
U$182  [#RX#13]  28.45,84.33 90 bottom
U$183  [#3V3#0]  25.91,83.82 90 top
U$184  [#3V3#0]  25.91,83.82 90 bottom
U$185  [#GND#4]  20.83,83.82 90 top
U$186  [#GND#4]  20.83,83.82 90 bottom
U$187  [#GND#5]  28.45,52.32 90 top
U$188  [#GND#5]  28.45,52.32 90 bottom
U$189  [#3V3#0]  30.99,52.32 90 top
U$190  [#3V3#0]  30.99,52.32 90 bottom
U$191  [#SCL#6]  33.53,52.07 90 top
U$192  [#SCL#6]  33.53,52.07 90 bottom
U$193  [#SDA#7]  36.07,52.2 90 top
U$194  [#SDA#7]  36.07,52.2 90 bottom
U$195  [#INT#8]  25.91,52.07 90 top
U$196  [#INT#8]  25.91,52.07 90 bottom
U$197  [#PPS#13]  18.29,52.07 90 top
U$198  [#PPS#13]  18.29,52.07 90 bottom
U$199  [##RST##15]  20.83,52.07 90 top
U$200  [##RST##15]  20.83,52.07 90 bottom
U$201  [##SAFE##16]  23.37,52.7 90 top
U$202  [##SAFE##16]  23.37,52.7 90 bottom
U$203  [SFE_LOGO_NAME_.1]  27.18,79.5 0 top
U$204  [U#BLOX19]  41.4,77.98 0 top
U$205  [SAM_M10Q0]  41.66,75.44 0 top
U$206  [U#BLOX19]  27.18,62.23 0 bottom
U$207  [SAM_M10Q0]  27.18,59.69 0 bottom
U$208  [#PWRLED#0]  13.72,60.96 0 bottom
U$209  [#PPSLED#0]  13.59,56.39 0 bottom
U$210  [#I2CPUR#0]  42.29,59.18 90 bottom
U$211  [SFE_LOGO_FLAME_STOP_.1]  55.12,50.55 0 top
U$212  [QWIIC_5MM]  85.6,63.5 0 top
U$213  [BLK4]  59.94,87.38 90 top
U$214  [BLK4]  59.94,87.38 90 bottom
U$215  [GRN5]  76.71,87.38 90 top
U$216  [GRN5]  76.71,87.38 90 bottom
U$217  [UART7]  80.39,87.38 0 top
U$218  [UART7]  80.26,87.38 0 bottom
U$219  [PPS9]  51.05,53.85 0 top
U$220  [PWR10]  51.05,63.5 0 top
U$221  [#TX#12]  72.14,84.33 90 top
U$222  [#TX#12]  72.14,84.33 90 bottom
U$223  [#RX#13]  69.6,84.33 90 top
U$224  [#RX#13]  69.6,84.33 90 bottom
U$225  [#3V3#0]  67.06,83.82 90 top
U$226  [#3V3#0]  67.06,83.82 90 bottom
U$227  [#GND#4]  61.98,83.82 90 top
U$228  [#GND#4]  61.98,83.82 90 bottom
U$229  [#GND#5]  69.6,52.32 90 top
U$230  [#GND#5]  69.6,52.32 90 bottom
U$231  [#3V3#0]  72.14,52.32 90 top
U$232  [#3V3#0]  72.14,52.32 90 bottom
U$233  [#SCL#6]  74.68,52.07 90 top
U$234  [#SCL#6]  74.68,52.07 90 bottom
U$235  [#SDA#7]  77.22,52.2 90 top
U$236  [#SDA#7]  77.22,52.2 90 bottom
U$237  [#INT#8]  67.06,52.07 90 top
U$238  [#INT#8]  67.06,52.07 90 bottom
U$239  [#PPS#13]  59.44,52.07 90 top
U$240  [#PPS#13]  59.44,52.07 90 bottom
U$241  [##RST##15]  61.98,52.07 90 top
U$242  [##RST##15]  61.98,52.07 90 bottom
U$243  [##SAFE##16]  64.52,52.7 90 top
U$244  [##SAFE##16]  64.52,52.7 90 bottom
U$245  [SFE_LOGO_NAME_.1]  68.33,79.5 0 top
U$246  [U#BLOX19]  82.55,77.98 0 top
U$247  [SAM_M10Q0]  82.8,75.44 0 top
U$248  [U#BLOX19]  68.33,62.23 0 bottom
U$249  [SAM_M10Q0]  68.33,59.69 0 bottom
U$250  [#PWRLED#0]  54.86,60.96 0 bottom
U$251  [#PPSLED#0]  54.74,56.39 0 bottom
U$252  [#I2CPUR#0]  83.44,59.18 90 bottom
U$253  [SFE_LOGO_FLAME_STOP_.1]  96.27,50.55 0 top
U$254  [QWIIC_5MM]  126.75,63.5 0 top
U$255  [BLK4]  101.09,87.38 90 top
U$256  [BLK4]  101.09,87.38 90 bottom
U$257  [GRN5]  117.86,87.38 90 top
U$258  [GRN5]  117.86,87.38 90 bottom
U$259  [UART7]  121.54,87.38 0 top
U$260  [UART7]  121.41,87.38 0 bottom
U$261  [PPS9]  92.2,53.85 0 top
U$262  [PWR10]  92.2,63.5 0 top
U$263  [#TX#12]  113.28,84.33 90 top
U$264  [#TX#12]  113.28,84.33 90 bottom
U$265  [#RX#13]  110.74,84.33 90 top
U$266  [#RX#13]  110.74,84.33 90 bottom
U$267  [#3V3#0]  108.2,83.82 90 top
U$268  [#3V3#0]  108.2,83.82 90 bottom
U$269  [#GND#4]  103.12,83.82 90 top
U$270  [#GND#4]  103.12,83.82 90 bottom
U$271  [#GND#5]  110.74,52.32 90 top
U$272  [#GND#5]  110.74,52.32 90 bottom
U$273  [#3V3#0]  113.28,52.32 90 top
U$274  [#3V3#0]  113.28,52.32 90 bottom
U$275  [#SCL#6]  115.82,52.07 90 top
U$276  [#SCL#6]  115.82,52.07 90 bottom
U$277  [#SDA#7]  118.36,52.2 90 top
U$278  [#SDA#7]  118.36,52.2 90 bottom
U$279  [#INT#8]  108.2,52.07 90 top
U$280  [#INT#8]  108.2,52.07 90 bottom
U$281  [#PPS#13]  100.58,52.07 90 top
U$282  [#PPS#13]  100.58,52.07 90 bottom
U$283  [##RST##15]  103.12,52.07 90 top
U$284  [##RST##15]  103.12,52.07 90 bottom
U$285  [##SAFE##16]  105.66,52.7 90 top
U$286  [##SAFE##16]  105.66,52.7 90 bottom
U$287  [SFE_LOGO_NAME_.1]  109.47,79.5 0 top
U$288  [U#BLOX19]  123.7,77.98 0 top
U$289  [SAM_M10Q0]  123.95,75.44 0 top
U$290  [U#BLOX19]  109.47,62.23 0 bottom
U$291  [SAM_M10Q0]  109.47,59.69 0 bottom
U$292  [#PWRLED#0]  96.01,60.96 0 bottom
U$293  [#PPSLED#0]  95.89,56.39 0 bottom
U$294  [#I2CPUR#0]  124.59,59.18 90 bottom
U$295  [SFE_LOGO_FLAME_STOP_.1]  137.41,50.55 0 top
U$296  [QWIIC_5MM]  167.89,63.5 0 top
U$297  [BLK4]  142.24,87.38 90 top
U$298  [BLK4]  142.24,87.38 90 bottom
U$299  [GRN5]  159,87.38 90 top
U$300  [GRN5]  159,87.38 90 bottom
U$301  [UART7]  162.69,87.38 0 top
U$302  [UART7]  162.56,87.38 0 bottom
U$303  [PPS9]  133.35,53.85 0 top
U$304  [PWR10]  133.35,63.5 0 top
U$305  [#TX#12]  154.43,84.33 90 top
U$306  [#TX#12]  154.43,84.33 90 bottom
U$307  [#RX#13]  151.89,84.33 90 top
U$308  [#RX#13]  151.89,84.33 90 bottom
U$309  [#3V3#0]  149.35,83.82 90 top
U$310  [#3V3#0]  149.35,83.82 90 bottom
U$311  [#GND#4]  144.27,83.82 90 top
U$312  [#GND#4]  144.27,83.82 90 bottom
U$313  [#GND#5]  151.89,52.32 90 top
U$314  [#GND#5]  151.89,52.32 90 bottom
U$315  [#3V3#0]  154.43,52.32 90 top
U$316  [#3V3#0]  154.43,52.32 90 bottom
U$317  [#SCL#6]  156.97,52.07 90 top
U$318  [#SCL#6]  156.97,52.07 90 bottom
U$319  [#SDA#7]  159.51,52.2 90 top
U$320  [#SDA#7]  159.51,52.2 90 bottom
U$321  [#INT#8]  149.35,52.07 90 top
U$322  [#INT#8]  149.35,52.07 90 bottom
U$323  [#PPS#13]  141.73,52.07 90 top
U$324  [#PPS#13]  141.73,52.07 90 bottom
U$325  [##RST##15]  144.27,52.07 90 top
U$326  [##RST##15]  144.27,52.07 90 bottom
U$327  [##SAFE##16]  146.81,52.7 90 top
U$328  [##SAFE##16]  146.81,52.7 90 bottom
U$329  [SFE_LOGO_NAME_.1]  150.62,79.5 0 top
U$330  [U#BLOX19]  164.85,77.98 0 top
U$331  [SAM_M10Q0]  165.1,75.44 0 top
U$332  [U#BLOX19]  150.62,62.23 0 bottom
U$333  [SAM_M10Q0]  150.62,59.69 0 bottom
U$334  [#PWRLED#0]  137.16,60.96 0 bottom
U$335  [#PPSLED#0]  137.03,56.39 0 bottom
U$336  [#I2CPUR#0]  165.74,59.18 90 bottom
U$337  [SFE_LOGO_FLAME_STOP_.1]  13.97,91.69 0 top
U$338  [QWIIC_5MM]  44.45,104.65 0 top
U$339  [BLK4]  18.8,128.52 90 top
U$340  [BLK4]  18.8,128.52 90 bottom
U$341  [GRN5]  35.56,128.52 90 top
U$342  [GRN5]  35.56,128.52 90 bottom
U$343  [UART7]  39.24,128.52 0 top
U$344  [UART7]  39.12,128.52 0 bottom
U$345  [PPS9]  9.91,95 0 top
U$346  [PWR10]  9.91,104.65 0 top
U$347  [#TX#12]  30.99,125.48 90 top
U$348  [#TX#12]  30.99,125.48 90 bottom
U$349  [#RX#13]  28.45,125.48 90 top
U$350  [#RX#13]  28.45,125.48 90 bottom
U$351  [#3V3#0]  25.91,124.97 90 top
U$352  [#3V3#0]  25.91,124.97 90 bottom
U$353  [#GND#4]  20.83,124.97 90 top
U$354  [#GND#4]  20.83,124.97 90 bottom
U$355  [#GND#5]  28.45,93.47 90 top
U$356  [#GND#5]  28.45,93.47 90 bottom
U$357  [#3V3#0]  30.99,93.47 90 top
U$358  [#3V3#0]  30.99,93.47 90 bottom
U$359  [#SCL#6]  33.53,93.22 90 top
U$360  [#SCL#6]  33.53,93.22 90 bottom
U$361  [#SDA#7]  36.07,93.34 90 top
U$362  [#SDA#7]  36.07,93.34 90 bottom
U$363  [#INT#8]  25.91,93.22 90 top
U$364  [#INT#8]  25.91,93.22 90 bottom
U$365  [#PPS#13]  18.29,93.22 90 top
U$366  [#PPS#13]  18.29,93.22 90 bottom
U$367  [##RST##15]  20.83,93.22 90 top
U$368  [##RST##15]  20.83,93.22 90 bottom
U$369  [##SAFE##16]  23.37,93.85 90 top
U$370  [##SAFE##16]  23.37,93.85 90 bottom
U$371  [SFE_LOGO_NAME_.1]  27.18,120.65 0 top
U$372  [U#BLOX19]  41.4,119.13 0 top
U$373  [SAM_M10Q0]  41.66,116.59 0 top
U$374  [U#BLOX19]  27.18,103.38 0 bottom
U$375  [SAM_M10Q0]  27.18,100.84 0 bottom
U$376  [#PWRLED#0]  13.72,102.11 0 bottom
U$377  [#PPSLED#0]  13.59,97.54 0 bottom
U$378  [#I2CPUR#0]  42.29,100.33 90 bottom
U$379  [SFE_LOGO_FLAME_STOP_.1]  55.12,91.69 0 top
U$380  [QWIIC_5MM]  85.6,104.65 0 top
U$381  [BLK4]  59.94,128.52 90 top
U$382  [BLK4]  59.94,128.52 90 bottom
U$383  [GRN5]  76.71,128.52 90 top
U$384  [GRN5]  76.71,128.52 90 bottom
U$385  [UART7]  80.39,128.52 0 top
U$386  [UART7]  80.26,128.52 0 bottom
U$387  [PPS9]  51.05,95 0 top
U$388  [PWR10]  51.05,104.65 0 top
U$389  [#TX#12]  72.14,125.48 90 top
U$390  [#TX#12]  72.14,125.48 90 bottom
U$391  [#RX#13]  69.6,125.48 90 top
U$392  [#RX#13]  69.6,125.48 90 bottom
U$393  [#3V3#0]  67.06,124.97 90 top
U$394  [#3V3#0]  67.06,124.97 90 bottom
U$395  [#GND#4]  61.98,124.97 90 top
U$396  [#GND#4]  61.98,124.97 90 bottom
U$397  [#GND#5]  69.6,93.47 90 top
U$398  [#GND#5]  69.6,93.47 90 bottom
U$399  [#3V3#0]  72.14,93.47 90 top
U$400  [#3V3#0]  72.14,93.47 90 bottom
U$401  [#SCL#6]  74.68,93.22 90 top
U$402  [#SCL#6]  74.68,93.22 90 bottom
U$403  [#SDA#7]  77.22,93.34 90 top
U$404  [#SDA#7]  77.22,93.34 90 bottom
U$405  [#INT#8]  67.06,93.22 90 top
U$406  [#INT#8]  67.06,93.22 90 bottom
U$407  [#PPS#13]  59.44,93.22 90 top
U$408  [#PPS#13]  59.44,93.22 90 bottom
U$409  [##RST##15]  61.98,93.22 90 top
U$410  [##RST##15]  61.98,93.22 90 bottom
U$411  [##SAFE##16]  64.52,93.85 90 top
U$412  [##SAFE##16]  64.52,93.85 90 bottom
U$413  [SFE_LOGO_NAME_.1]  68.33,120.65 0 top
U$414  [U#BLOX19]  82.55,119.13 0 top
U$415  [SAM_M10Q0]  82.8,116.59 0 top
U$416  [U#BLOX19]  68.33,103.38 0 bottom
U$417  [SAM_M10Q0]  68.33,100.84 0 bottom
U$418  [#PWRLED#0]  54.86,102.11 0 bottom
U$419  [#PPSLED#0]  54.74,97.54 0 bottom
U$420  [#I2CPUR#0]  83.44,100.33 90 bottom
U$421  [SFE_LOGO_FLAME_STOP_.1]  96.27,91.69 0 top
U$422  [QWIIC_5MM]  126.75,104.65 0 top
U$423  [BLK4]  101.09,128.52 90 top
U$424  [BLK4]  101.09,128.52 90 bottom
U$425  [GRN5]  117.86,128.52 90 top
U$426  [GRN5]  117.86,128.52 90 bottom
U$427  [UART7]  121.54,128.52 0 top
U$428  [UART7]  121.41,128.52 0 bottom
U$429  [PPS9]  92.2,95 0 top
U$430  [PWR10]  92.2,104.65 0 top
U$431  [#TX#12]  113.28,125.48 90 top
U$432  [#TX#12]  113.28,125.48 90 bottom
U$433  [#RX#13]  110.74,125.48 90 top
U$434  [#RX#13]  110.74,125.48 90 bottom
U$435  [#3V3#0]  108.2,124.97 90 top
U$436  [#3V3#0]  108.2,124.97 90 bottom
U$437  [#GND#4]  103.12,124.97 90 top
U$438  [#GND#4]  103.12,124.97 90 bottom
U$439  [#GND#5]  110.74,93.47 90 top
U$440  [#GND#5]  110.74,93.47 90 bottom
U$441  [#3V3#0]  113.28,93.47 90 top
U$442  [#3V3#0]  113.28,93.47 90 bottom
U$443  [#SCL#6]  115.82,93.22 90 top
U$444  [#SCL#6]  115.82,93.22 90 bottom
U$445  [#SDA#7]  118.36,93.34 90 top
U$446  [#SDA#7]  118.36,93.34 90 bottom
U$447  [#INT#8]  108.2,93.22 90 top
U$448  [#INT#8]  108.2,93.22 90 bottom
U$449  [#PPS#13]  100.58,93.22 90 top
U$450  [#PPS#13]  100.58,93.22 90 bottom
U$451  [##RST##15]  103.12,93.22 90 top
U$452  [##RST##15]  103.12,93.22 90 bottom
U$453  [##SAFE##16]  105.66,93.85 90 top
U$454  [##SAFE##16]  105.66,93.85 90 bottom
U$455  [SFE_LOGO_NAME_.1]  109.47,120.65 0 top
U$456  [U#BLOX19]  123.7,119.13 0 top
U$457  [SAM_M10Q0]  123.95,116.59 0 top
U$458  [U#BLOX19]  109.47,103.38 0 bottom
U$459  [SAM_M10Q0]  109.47,100.84 0 bottom
U$460  [#PWRLED#0]  96.01,102.11 0 bottom
U$461  [#PPSLED#0]  95.89,97.54 0 bottom
U$462  [#I2CPUR#0]  124.59,100.33 90 bottom
U$463  [SFE_LOGO_FLAME_STOP_.1]  137.41,91.69 0 top
U$464  [QWIIC_5MM]  167.89,104.65 0 top
U$465  [BLK4]  142.24,128.52 90 top
U$466  [BLK4]  142.24,128.52 90 bottom
U$467  [GRN5]  159,128.52 90 top
U$468  [GRN5]  159,128.52 90 bottom
U$469  [UART7]  162.69,128.52 0 top
U$470  [UART7]  162.56,128.52 0 bottom
U$471  [PPS9]  133.35,95 0 top
U$472  [PWR10]  133.35,104.65 0 top
U$473  [#TX#12]  154.43,125.48 90 top
U$474  [#TX#12]  154.43,125.48 90 bottom
U$475  [#RX#13]  151.89,125.48 90 top
U$476  [#RX#13]  151.89,125.48 90 bottom
U$477  [#3V3#0]  149.35,124.97 90 top
U$478  [#3V3#0]  149.35,124.97 90 bottom
U$479  [#GND#4]  144.27,124.97 90 top
U$480  [#GND#4]  144.27,124.97 90 bottom
U$481  [#GND#5]  151.89,93.47 90 top
U$482  [#GND#5]  151.89,93.47 90 bottom
U$483  [#3V3#0]  154.43,93.47 90 top
U$484  [#3V3#0]  154.43,93.47 90 bottom
U$485  [#SCL#6]  156.97,93.22 90 top
U$486  [#SCL#6]  156.97,93.22 90 bottom
U$487  [#SDA#7]  159.51,93.34 90 top
U$488  [#SDA#7]  159.51,93.34 90 bottom
U$489  [#INT#8]  149.35,93.22 90 top
U$490  [#INT#8]  149.35,93.22 90 bottom
U$491  [#PPS#13]  141.73,93.22 90 top
U$492  [#PPS#13]  141.73,93.22 90 bottom
U$493  [##RST##15]  144.27,93.22 90 top
U$494  [##RST##15]  144.27,93.22 90 bottom
U$495  [##SAFE##16]  146.81,93.85 90 top
U$496  [##SAFE##16]  146.81,93.85 90 bottom
U$497  [SFE_LOGO_NAME_.1]  150.62,120.65 0 top
U$498  [U#BLOX19]  164.85,119.13 0 top
U$499  [SAM_M10Q0]  165.1,116.59 0 top
U$500  [U#BLOX19]  150.62,103.38 0 bottom
U$501  [SAM_M10Q0]  150.62,100.84 0 bottom
U$502  [#PWRLED#0]  137.16,102.11 0 bottom
U$503  [#PPSLED#0]  137.03,97.54 0 bottom
U$504  [#I2CPUR#0]  165.74,100.33 90 bottom

## Library data of the parts
BT1-BT12 = SparkFun-Batteries; PROD_ID: BATT-14267
C1-C24 = SparkFun-Capacitors; PROD_ID: CAP-00810
D1 D5 D8 D11 D14 D17 D20 D23 D26 D29 D32 D35 = SparkFun-LED; PROD_ID: DIO-09003
D2 D4 D7 D10 D13 D16 D19 D22 D25 D28 D31 D34 = SparkFun-DiscreteSemi; PROD_ID: DIO-10955
D3 D6 D9 D12 D15 D18 D21 D24 D27 D30 D33 D36 = SparkFun-LED; PROD_ID: DIO-00819
E$1-E$4 FD1-FD48 LOGO1-LOGO24 U$1 U$2 U$31 U$43 U$44 U$77 U$85 U$86 U$119 U$127 U$128 U$161 U$169 U$170 U$203 U$211 U$212 U$245 U$253 U$254 U$287 U$295 U$296 U$329 U$337 U$338 U$371 U$379 U$380 U$413 U$421 U$422 U$455 U$463 U$464 U$497 = SparkFun-Aesthetics
E$5 E$6 = SparkFun-Retired
H1-H48 = SparkFun-Hardware
I2CPUR I2CPUR1-I2CPUR11 PPSLED PPSLED1-PPSLED11 PWRLED PWRLED1-PWRLED11 = SparkFun-Jumpers
J1 J2 J5 J6 J9 J10 J13 J14 J17 J18 J21 J22 J25 J26 J29 J30 J33 J34 J37 J38 J41 J42 J45 J46 = SparkFun-Connectors; PROD_ID: CONN-13694
J3 J8 J12 J16 J20 J24 J28 J32 J36 J40 J44 J48 = SparkFun-Connectors; PROD_ID: CONN-08438
J4 J7 J11 J15 J19 J23 J27 J31 J35 J39 J43 J47 = SparkFun-Connectors
R1 R8 R9 R13 R14 R18 R22 R23 R27 R31 R32 R36 R40 R41 R45 R49 R50 R54 R58 R59 R63 R67 R68 R72 R76 R77 R81 R85 R86 R90 R94 R95 R99 R103 R104 R108 = SparkFun-Resistors; PROD_ID: RES-08272
R2 R10 R19 R28 R37 R46 R55 R64 R73 R82 R91 R100 = SparkFun-Resistors; PROD_ID: RES-07851
R3 R17 R26 R35 R44 R53 R62 R71 R80 R89 R98 R107 = SparkFun-Resistors; PROD_ID: RES-07856
R4 R5 R15 R16 R24 R25 R33 R34 R42 R43 R51 R52 R60 R61 R69 R70 R78 R79 R87 R88 R96 R97 R105 R106 = SparkFun-Resistors; PROD_ID: RES-08698
R6 R7 R11 R12 R20 R21 R29 R30 R38 R39 R47 R48 R56 R57 R65 R66 R74 R75 R83 R84 R92 R93 R101 R102 = SparkFun-Resistors; PROD_ID: RES-07869
U1-U12 = u-blox_SAM-M10Q; PROD_ID: IC-17910
U$3-U$30 U$32-U$42 U$45-U$76 U$78-U$84 U$87-U$118 U$120-U$126 U$129-U$160 U$162-U$168 U$171-U$202 U$204-U$210 U$213-U$244 U$246-U$252 U$255-U$286 U$288-U$294 U$297-U$328 U$330-U$336 U$339-U$370 U$372-U$378 U$381-U$412 U$414-U$420 U$423-U$454 U$456-U$462 U$465-U$496 U$498-U$504 = output